# EAGLE board qo-100-pa-250W-small (EAGLE 9.6.2)
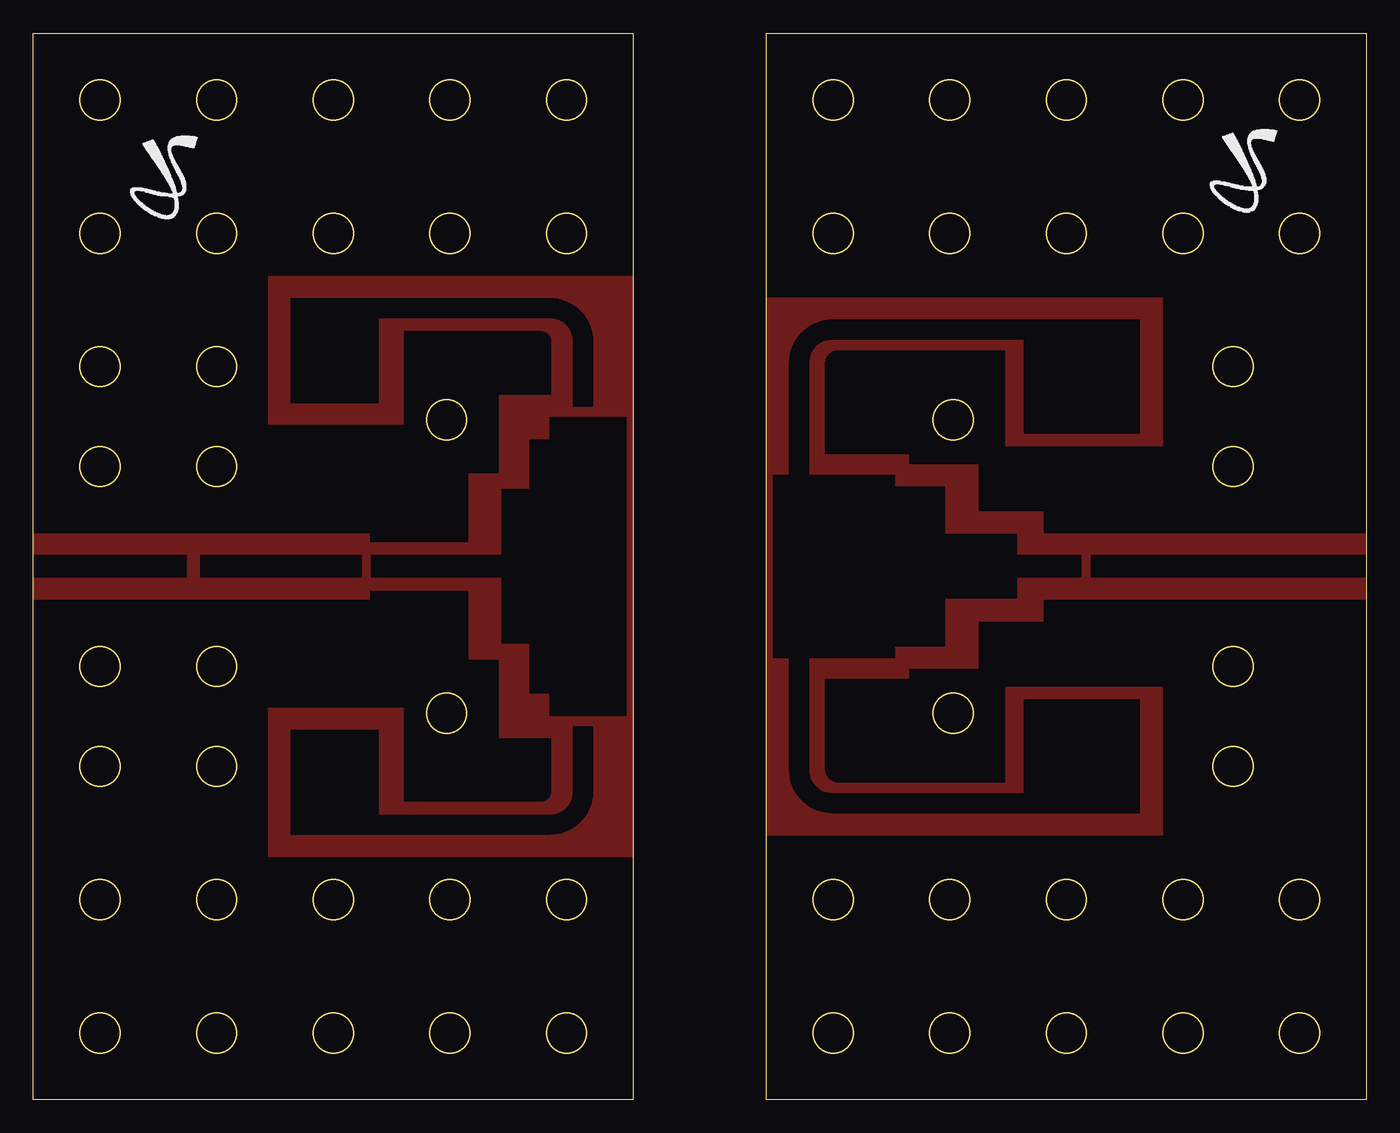
[diagram p0: board, top side]

Size 100 x 80 mm. Coordinates in mm from the lower left corner, seen from the top.
Outline: 0,0 0,80 45,80 45,0 0,0
Outline: 55,0 55,80 100,80 100,0 55,0
Outline: circle at 31,29 radius 1.5
Outline: circle at 5,65 radius 1.5
Outline: circle at 31,51 radius 1.5
Outline: circle at 40,65 radius 1.5
Outline: circle at 60,65 radius 1.5
Outline: circle at 69,51 radius 1.5
Outline: circle at 95,65 radius 1.5
Outline: circle at 90,55 radius 1.5
Outline: circle at 90,25 radius 1.5
Outline: circle at 69,29 radius 1.5
Outline: circle at 5,75 radius 1.5
Outline: circle at 40,75 radius 1.5
Outline: circle at 60,75 radius 1.5
Outline: circle at 95,75 radius 1.5
Outline: circle at 13.75,75 radius 1.5
Outline: circle at 22.5,75 radius 1.5
Outline: circle at 31.25,75 radius 1.5
Outline: circle at 13.75,65 radius 1.5
Outline: circle at 22.5,65 radius 1.5
Outline: circle at 31.25,65 radius 1.5
Copper layers (1*16): Top 0.035mm / dielectric 0.15mm / Bottom 0.035mm
Design rules "default *": minimum track width 6mil, minimum drill 0.35mm, track to track 0mil, track to pad 6mil, pad to pad 6mil, via to via 6mil, smd to smd 6mil, copper to edge 0mil, drill to drill 6mil, minimum pad ring 10mil, minimum via ring 8mil, stop-mask expansion 4mil, vias tented up to drill 0mil, thermal gap 10mil
Holes 3 mm at 5,65 40,65 31,51 31,29 60,65 95,65 90,55 90,25 69,29 69,51 5,75 40,75 60,75 95,75 13.75,65 22.5,65 31.25,65 13.75,75 22.5,75 31.25,75 86.25,65 86.25,75 77.5,65 77.5,75 68.75,65 68.75,75 5,5 40,5 60,5 95,5 5,15 40,15 60,15 95,15 13.75,5 22.5,5 31.25,5 13.75,15 22.5,15 31.25,15 86.25,5 86.25,15 77.5,5 77.5,15 68.75,5 68.75,15 5,25 5,32.5 13.75,25 13.75,32.5 5,47.5 5,55 13.75,47.5 13.75,55 90,32.5 90,47.5

## Placement (x,y rotation side)
E$1  [JS_5MM]  93.5,73 0 top
E$2  [JS_5MM]  12.5,72.5 0 top

## Library data of the parts
E$1 E$2 = Silkscreen

## Tracks (layer width: path | path; a pad name or v marks a point on that pad's centre or on a via)
BIAS
  cutout Top: 19.32,27.73 19.32,19.86 38.74,19.86 arc90 42,23.12 42,28 40.5,28 40.5,23.12 arc-90 38.74,21.36 25.9,21.36 25.9,27.73
  cutout Top: 58.2,46.86 58.2,55.26 arc-90 59.96,57.02 74.34,57.02 74.34,49.98 83,49.98 83,58.52 59.96,58.52 arc90 56.7,55.26 56.7,46.86
BIAS1
  cutout Top: 19.32,52.27 19.32,60.14 38.74,60.14 arc-90 42,56.88 42,52 40.5,52 40.5,56.88 arc90 38.74,58.64 25.9,58.64 25.9,52.27
BIAS2
  cutout Top: 58.2,33.14 58.2,24.74 arc90 59.96,22.98 74.34,22.98 74.34,30.02 83,30.02 83,21.48 59.96,21.48 arc-90 56.7,24.74 56.7,33.14
DRAIN
  cutout Top: 55.5,33.14 64.66,33.14 64.66,34 68.4,34 68.4,37.58 73.8,37.58 73.8,39.16 78.63,39.16 78.63,40.84 73.8,40.84 73.8,42.42 68.4,42.42 68.4,46 64.66,46 64.66,46.86 55.5,46.86
GATE
  cutout Top: 25.34,39.16 35.12,39.16 35.12,34.2 37.22,34.2 37.22,30.47 38.73,30.47 38.73,28.79 44.5,28.79 44.5,51.21 38.73,51.21 38.73,49.53 37.22,49.53 37.22,45.8 35.12,45.8 35.12,40.84 25.34,40.84
GND
  cutout Top: 0,42.51 0,80 45,80 45,61.81 17.57,61.81 17.57,50.59 27.8,50.59 27.8,57.64 38.09,57.64 arc-90 38.85,56.88 38.85,52.89 34.89,52.89 34.89,47 32.62,47 32.62,41.84 25.25,41.84 25.25,42.51
  cutout Top: 0,37.49 0,0 45,0 45,18.19 17.57,18.19 17.57,29.41 27.8,29.41 27.8,22.36 38.09,22.36 arc90 38.85,23.12 38.85,27.11 34.89,27.11 34.89,33 32.62,33 32.62,38.16 25.25,38.16 25.25,37.49
  cutout Top: 55,0 100,0 100,37.5 75.83,37.5 75.83,35.84 70.95,35.84 70.95,32.32 65.73,32.32 65.73,31.56 59.4,31.56 59.4,24.79 arc90 60.4,23.79 72.9,23.79 72.9,31 84.8,31 84.8,19.78 55,19.78
GND1
  cutout Top: 55,80 100,80 100,42.5 75.83,42.5 75.83,44.16 70.95,44.16 70.95,47.68 65.73,47.68 65.73,48.44 59.4,48.44 59.4,55.21 arc-90 60.4,56.21 72.9,56.21 72.9,49 84.8,49 84.8,60.22 55,60.22
IN
  cutout Top: 12.5,40.84 12.5,39.16 24.62,39.16 24.62,40.84
IN1
  cutout Top: 100,39.16 100,40.84 79.36,40.84 79.36,39.16
IN2
  cutout Top: 0,40.84 0,39.16 11.5,39.16 11.5,40.84
NEGATIVE
  pour Top: 0,0 45,0 45,80 0,80
  pour Top: 55,0 55,80 100,80 100,0